# Altium PCB snes_hook.PcbDoc
Units mil, origin at the board's own origin, x right, y up, seen from the top; angles counter-clockwise.
Board outline 2105.71 x 1374.61 mil, 2 copper layers (Top Layer, Bottom Layer); 12 components, 37 nets, 155 pads, 28 vias.
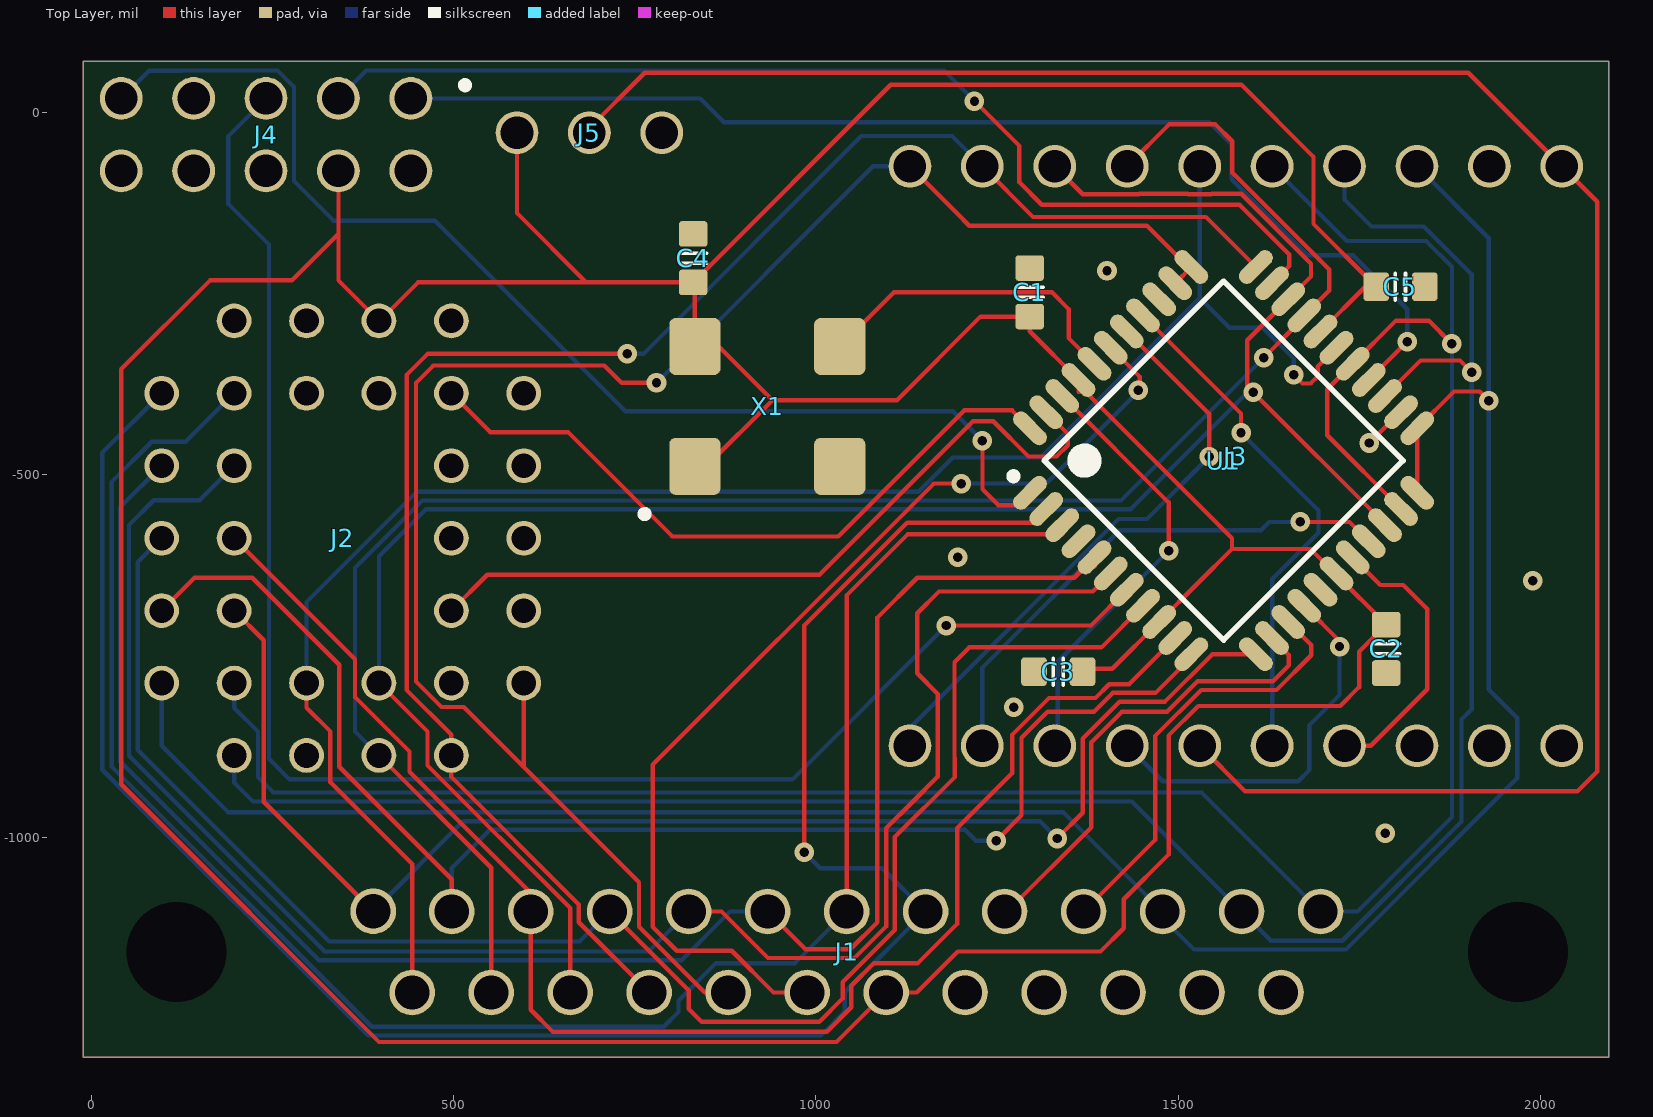
[diagram p0: Top Layer view]
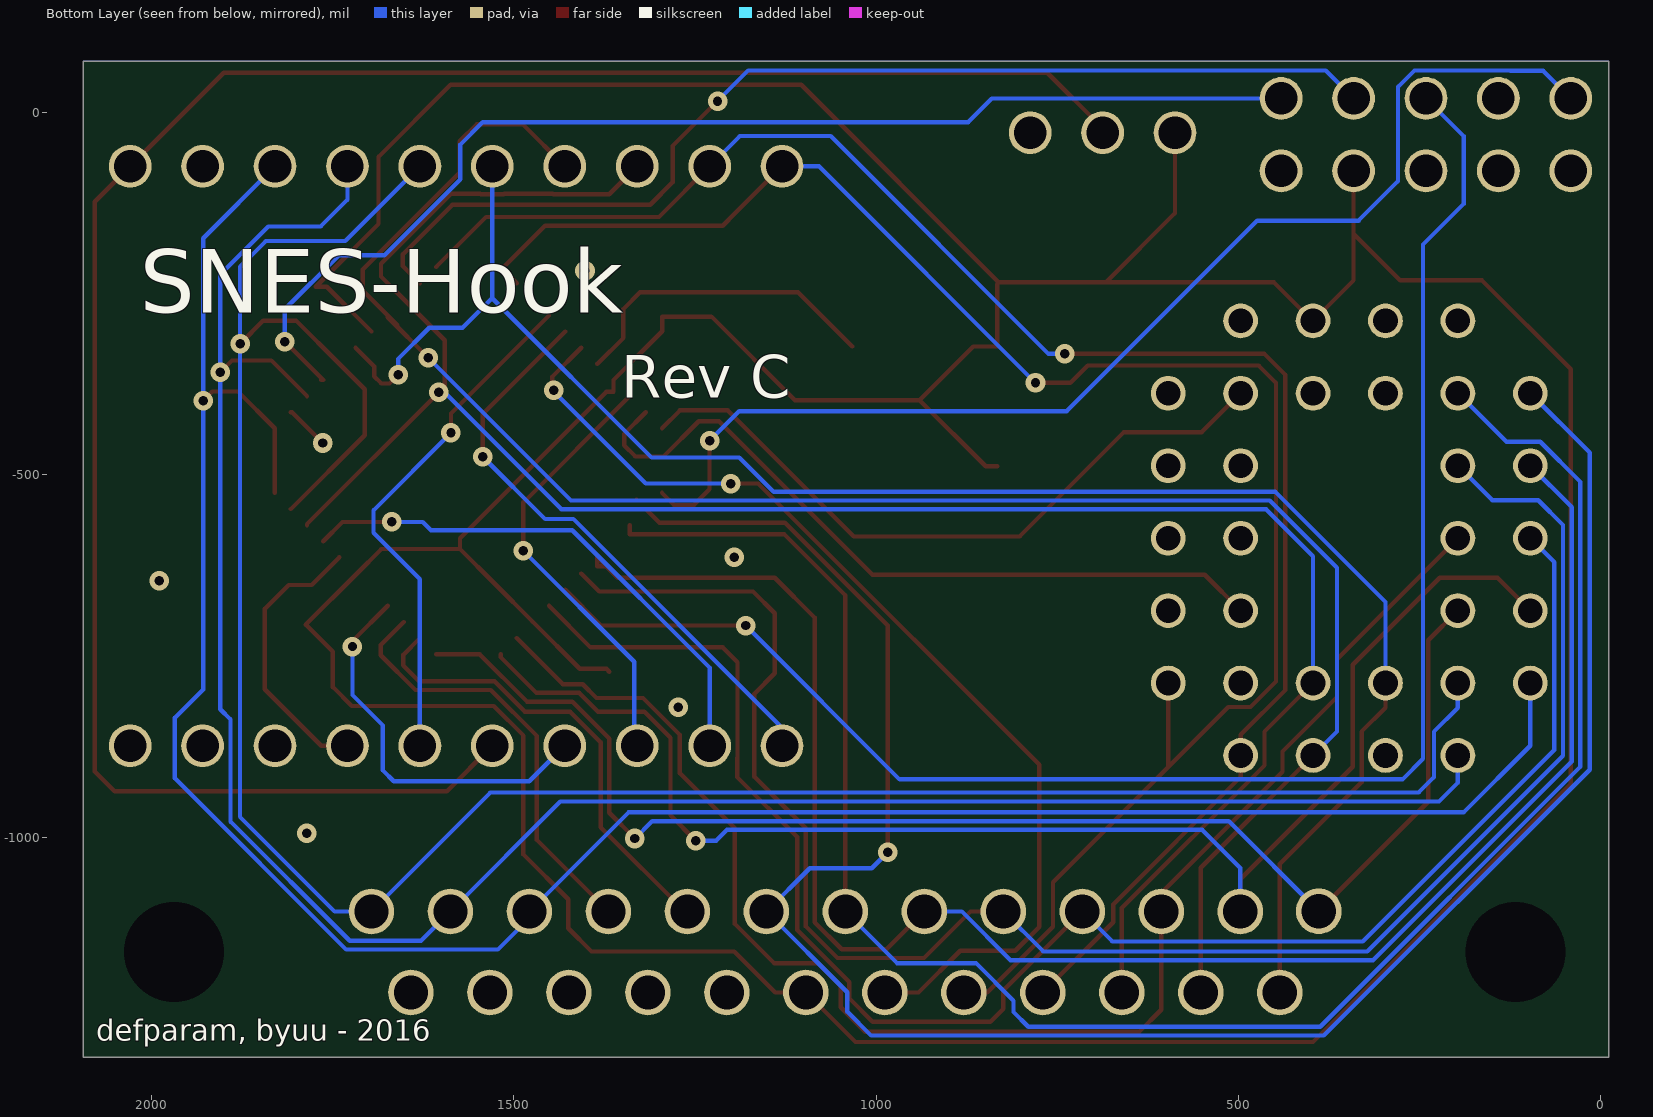
[diagram p1: Bottom Layer view, seen from below]

## Layer stack, top to bottom
Top Solder: solder mask 0.4, Solder Resist, Dk 3.5
Top Layer: signal copper 1.4
Dielectric 1: dielectric 12.6, FR-4, Dk 4.8
Bottom Layer: signal copper 1.4
Bottom Solder: solder mask 0.4, Solder Resist, Dk 3.5

## Board outline
-11.22,-1303.75 -11.22,70.87 2094.45,70.87 2094.5,-1303.75

## Design rules (kind name [scope] priority, off if disabled: settings)
Clearance [All] p1: gap=6
HoleSize [All] p1: absolutevalues=TRUE maxlimit=300 minlimit=13 maxpercent=80.000 minpercent=20.000
HoleToHoleClearance [All] p1: gap=6 allowstackedmicrovias=TRUE
MinimumAnnularRing [All] p1: minimumring=7
PolygonConnect [All] p1: connectstyle=Relief reliefconductorwidth=10 reliefentries=4 polygonreliefangle="90 Angle" airgapwidth=10
RoomDefinition snes_hook [InComponentClass('snes_hook')] p1: confinementstyle=ConfineIn formatcopy=TRUE lockcomponents=FALSE outline -428,-2536 2959,-2536 2959,538 -428,538
RoutingVias [All] p1: holewidth=25 width=40 viastyle="Through Hole" minholewidth=28 minwidth=50 maxholewidth=28 maxwidth=50
SolderMaskExpansion [All] p1: expansion=4
Width [All] p1: maxlimit=30 minlimit=6 preferedwidth=6 minimp=50.000000 maximp=50.000000 favimp=50.000000
28 further rules are at their usual default settings.

## Components (designator, comment, footprint, x,y, rotation, side; value= is the part's Value field where it differs from the comment)
C1 "approved sub OK" CAPC1608X90N 1295.28,-248.03 r90 top
C2 "approved sub OK" CAPC1608X90N 1787.4,-740.16 r270 top
C3 "approved sub OK" CAPC1608X90N 1334.65,-771.65 r180 top
C4 "approved sub OK" CAPC1608X90N 830.71,-200.79 r90 top
C5 "approved sub OK" CAPC1608X90N 1807.09,-240.16 r0 top
J1 "SNES_EXP_DB25" DB-25_RA_MPLUG 279.53,-177.17 r0 top locked
J2 "SST39SF010A-PLCC32" PLCC_SOCKET_7x9_32P 196.85,-287.4 r0 top locked
J3 "ADAFRUIT_232H" ADAFRUIT_232H 1129.92,-874.02 r90 top locked
J4 "ALTERA_JTAG_CONN" JTAG_CONN 440.94,19.68 r180 top locked
J5 "SELECT_3PIN" HEADER_3PIN 787.4,-27.56 r180 top locked
U1 "EPM7064STC44-10" TQFP44_L 1562.99,-480.32 r45 top locked
X1 "CTX314CT-ND" OSCILLATOR_7x5 933.07,-405.51 r0 top

## Footprints (in the part's own frame and the unit in brackets; to place one, negate y for a bottom-side part, rotate by r counter-clockwise, add the part's x,y. Pads: shape width x height; smd on the part's side, far side on the other; paste and mask are expansions set on the pad)
ADAFRUIT_232H [mil]
  round 59 hole 45: 1(0,0) 2(0,-100) 3(0,-200) 4(0,-300) 5(0,-400) 6(0,-500) 7(0,-600) 8(0,-700) 9(0,-800) 10(0,-900) 11(800,-900) 12(800,-800) 13(800,-700) 14(800,-600) 15(800,-500) 16(800,-400) 17(800,-300) 18(800,-200) 19(800,-100) 20(800,0)
  body extent -48,-1247 853,264, height 510
CAPC1608X90N [mm] "Chip Capacitor, Body 1.6x0.8mm, EIA 0603, IPC Medium Density"
  round 0.254 on Mech15: 0(0,0)
  rrect25% 0.9x1 smd: 1(-0.85,0) 2(0.85,0)
  Top Layer pour cut-out: -0.6,0.5 -0.4,0.7 0.4,0.7 0.6,0.5 0.6,-0.5 0.4,-0.7 -0.4,-0.7 -0.6,-0.5
  silkscreen extent -0.18,-0.48 0.18,0.48, body extent -0.85,-0.45 0.85,0.45, height 0.89
DB-25_RA_MPLUG [mm]
  round 1.6 hole 1.2: 1(2.78,-23.5) 2(5.53,-23.51) 3(8.3,-23.51) 4(11.07,-23.51) 5(13.84,-23.51) 6(16.61,-23.51) 7(19.38,-23.51) 8(22.15,-23.51) 9(24.92,-23.51) 10(27.69,-23.51) 11(30.46,-23.51) 12(33.23,-23.51) 13(36,-23.51) 14(4.145,-26.35) 15(6.915,-26.35) 16(9.685,-26.35) 17(12.455,-26.35) 18(15.225,-26.35) 19(17.995,-26.35) 20(20.765,-26.35) 21(23.535,-26.35) 22(26.305,-26.35) 23(29.075,-26.35) 24(31.845,-26.35) 25(34.615,-26.35)
  round 1.524 hole 3.5 unplated: ""(-4.12,-24.93) ""(42.92,-24.93)
  body extent -7.16,-40.59 45.87,-21.44, height 12.55
HEADER_3PIN [mm]
  round 1.5 hole 1.143: 1(0,0) 2(2.54,0) 3(5.08,0)
  body extent -1.27,-1.27 6.35,1.27, height 8.54
JTAG_CONN [mm]
  round 1.5 hole 1.143: 1(0,0) 2(0,2.54) 3(2.54,0) 4(2.54,2.54) 5(5.08,0) 6(5.08,2.54) 7(7.62,0) 8(7.62,2.54) 9(10.16,0) 10(10.16,2.54)
  body extent -1.27,-1.27 11.43,3.81, height 8.54
OSCILLATOR_7x5 [mm] "SMD Crystal 4-lead leadless package"
  rrect25% 1.8x2 smd mask+0.075: 1(-2.54,-2.1) 2(2.54,-2.1) 3(2.54,2.1) 4(-2.54,2.1)
  body extent -3.55,-2.5 3.45,2.5, height 1.65
PLCC_SOCKET_7x9_32P [mil]
  round 48 hole 34: 1(200,-100) 2(100,0) 3(100,-100) 4(0,0) 5(-100,-100) 6(0,-100) 7(-100,-200) 8(0,-200) 9(-100,-300) 10(0,-300) 11(-100,-400) 12(0,-400) 13(-100,-500) 14(0,-600) 15(0,-500) 16(100,-600) 17(100,-500) 18(200,-600) 19(200,-500) 20(300,-600) 21(400,-500) 22(300,-500) 23(400,-400) 24(300,-400) 25(400,-300) 26(300,-300) 27(400,-200) 28(300,-200) 29(400,-100) 30(300,0) 31(300,-100) 32(200,0)
  body extent -203,-712 517,108, height 330
TQFP44_L [mm] "Thin QFP, 44-Leads, Body 10x10mm, Pitch 0.8mm, IPC High Density"
  oval 1.45x0.55 smd: 1(-5.6,4) 2(-5.6,3.2) 3(-5.6,2.4) 4(-5.6,1.6) 5(-5.6,0.8) 6(-5.6,0) 7(-5.6,-0.8) 8(-5.6,-1.6) 9(-5.6,-2.4) 10(-5.6,-3.2) 11(-5.6,-4) 23(5.6,-4) 24(5.6,-3.2) 25(5.6,-2.4) 26(5.6,-1.6) 27(5.6,-0.8) 28(5.6,0) 29(5.6,0.8) 30(5.6,1.6) 31(5.6,2.4) 32(5.6,3.2) 33(5.6,4)
  oval 0.55x1.45 smd: 12(-4,-5.6) 13(-3.2,-5.6) 14(-2.4,-5.6) 15(-1.6,-5.6) 16(-0.8,-5.6) 17(0,-5.6) 18(0.8,-5.6) 19(1.6,-5.6) 20(2.4,-5.6) 21(3.2,-5.6) 22(4,-5.6) 34(4,5.6) 35(3.2,5.6) 36(2.4,5.6) 37(1.6,5.6) 38(0.8,5.6) 39(0,5.6) 40(-0.8,5.6) 41(-1.6,5.6) 42(-2.4,5.6) 43(-3.2,5.6) 44(-4,5.6)
  silkscreen extent -5.72,-4.45 4.45,4.95, body extent -5,-5 5,5, height 1.2

## Part data
C1 C2 C3 C4 C5: library part CAPC_100n_0603_X7R_50V_10%, "Capacitor SMD Cer 100nF 10% 50V X7R 0603"
U1: "MAX 7000S 5V In-System Programmable CPLD, 64 Macrocells, 44-Pin TQFP, Speed Grade 10, Commercial Grade"
X1: library part CTX314CT-ND_40MHz, "40 MHz 5v Oscillator"

## Via types
v1: diameter 27, hole 13, Top Layer to Bottom Layer, tented both sides, 28 vias

## Nets (pads, with @x,y where several pads share a name; then routed paths per layer and width w, separated by ;. In a path a pad name is that pad's centre, name@x,y a point inside that pad or via, vN(x,y) a via of type N, cw(c..) or ccw(c..) an arc to the next point about the centre after c; other vN are vias at no path point)
CLK_40: U1.40 X1.3 | length 447
  Top Layer w6: X1.3 1107.9,-248 1326,-248 1349,-271 1349,-310.86 U1.40
D0: J1.11 J2.13 J3.13 U1.22 U1.23 | length 3294.1
  Top Layer w6: U1.22 U1.23 1881.02,-385 1916.5,-385 v1(1929.13,-397.64)
  Bottom Layer w6: J2.13 96.85,-873.85 189,-966 1341.98,-966 J1.11 1478.74,-1111.74 1522.25,-1155.25 1731.8,-1155.25 1968.42,-918.63 1968.42,-835.52 1929.13,-796.23 v1(1929.13,-397.64) 1929.13,-173.23 J3.13
D1: J1.12 J2.14 J3.14 U1.25 | length 3063.2
  Top Layer w6: U1.25 1834.94,-342 1889.24,-342 v1(1905.51,-358.27)
  Bottom Layer w6: J2.14 196.85,-924.85 223,-951 1436.04,-951 J1.12 1628.29,-1143.25 1726.83,-1143.25 1891.42,-978.66 1891.42,-837.58 1905.51,-823.49 v1(1905.51,-358.27) 1905.51,-223.19 1839.37,-157.04 1766.99,-157.04 1729.92,-119.98 J3.14
D2: J1.13 J2.15 J3.15 U1.21 U1.27 | length 3419.9
  Top Layer w6: U1.21 1706,-445.16 1706,-381.85 U1.27 1800.85,-287 1846.05,-287 v1(1877.95,-318.9)
  Bottom Layer w6: J2.15 196.85,-821.4 229.85,-854.4 229.85,-917.22 251.14,-938.51 1532.61,-938.51 J1.13 1747.64,-1102.76 1878.18,-972.22 1878.18,-212.82 1842.52,-177.17 1733.07,-177.17 J3.15
D3: J1.14 J2.17 J3.16 U1.28 | length 2649.5
  Top Layer w6: J2.17 296.85,-821.4 329.85,-854.4 329.85,-924.34 442.72,-1037.2 J1.14 ; v1(1660,-362) 1671.92,-373.92 1683.08,-373.92 1693,-364 1693,-350.31 U1.28
  Bottom Layer w6: J2.17 296.85,-675.59 448.82,-523.62 449.01,-523.43 1080.5,-523.43 1141.57,-523.43 1189,-476 1310,-476 1529.92,-256.08 J3.16 1529.92,-255.92 1571,-297 1617,-297 1660,-340 v1(1660,-362)
D4: J1.15 J2.18 J3.17 U1.30 | length 2628.3
  Top Layer w6: J2.18 551.77,-1042.32 J1.15 ; J3.17 1488.19,-15.75 1551.18,-15.75 1574.8,-39.37 1574.8,-82.68 1708.66,-216.54 1708.66,-245.56 U1.30 ; v1(1618.11,-338.58) 1674.35,-282.34 U1.30 ; U1.30@1661.01,-293.21 U1.30
  Bottom Layer w6: J2.18 363.78,-854.34 363.78,-628.34 456.69,-535.43 1421.26,-535.43 v1(1618.11,-338.58)
D5: J1.16 J2.19 J3.18 U1.20 U1.31 | length 2899
  Top Layer w6: J2.19 463.85,-854.4 463.85,-901.07 660.83,-1098.05 J1.16 ; J3.18 1368.42,-112.52 1445.87,-112.52 1446.38,-112 1513.46,-112 1513.97,-112.52 1545.87,-112.52 1546.38,-112 1587.15,-112 1683.58,-208.42 1683.58,-226.1 U1.31 1595.61,-314.07 1595.61,-377.85 1603.76,-386 v1(1604,-386) 1604,-386.24 1785.7,-567.94 U1.20
  Bottom Layer w6: J2.19 396.85,-612.25 461.66,-547.43 1434.57,-547.43 1596,-386 v1(1604,-386)
D6: J1.17 J2.20 J3.19 U1.33 | length 2375.3
  Top Layer w6: v1(739.58,-333) 551,-333 464,-333 435,-362 435,-797 496.85,-858.85 J2.20 496.85,-917.1 672.83,-1093.08 672.83,-1117.51 J1.17 ; J3.19 1299.9,-144 1538.47,-144 U1.33
  Bottom Layer w6: v1(739.58,-333) 761.99,-333 1062.78,-32.21 1188.11,-32.21 J3.19
D7: J1.18 J2.21 J3.20 U1.34 U1.35 | length 2476.2
  Top Layer w6: J2.21 596.85,-903.26 ; v1(780,-373) 732,-373 708,-349 472,-349 448,-373 448,-785.22 483.18,-820.4 513.99,-820.4 596.85,-903.26 ; J1.18 846.57,-1214.57 755.85,-1123.85 755.85,-1062.26 596.85,-903.26 ; J3.20 1194.11,-138.21 1211.9,-156 1457,-156 1514.06,-213.06 U1.34 U1.35
  Bottom Layer w6: v1(780,-373) 1078.98,-74.02 J3.20
GND: C1.2 C2.2 C3.2 C4.2 C5.2 J1.23 J2.2 J2.3 J2.4 J2.16 J2.22 J2.23 J2.25 J2.26 J2.27 J2.28 J2.29 J3.12 J4.2 J4.10 U1.4 U1.16 U1.24 U1.36 X1.2 | length 61.6
  Top Layer w6: v1(1764,-456) 1806.5,-413.5 U1.24
  other v1: 1786,-995 1273,-821 1990,-646 1196,-614 1402,-218
PA0: J1.1 J2.12 U1.12 | length 1940
  Top Layer w6: J2.12 237.78,-728.34 237.78,-951.17 J1.1 ; v1(1333,-1002) 1368.42,-966.58 1368.42,-864.1 1419.52,-813 1482,-813 1547.43,-747.57 U1.12
  Bottom Layer w6: J1.1 513.34,-978 1309,-978 v1(1333,-1002)
PA1: J1.2 J2.11 U1.11 | length 2008.7
  Top Layer w6: J2.11 142.25,-642 222,-642 342,-762 342,-903 497.24,-1058.24 J1.2 ; v1(1249,-1005) 1283.99,-970.01 1283.99,-863.01 1320,-827 1383.97,-827 1409.97,-801 1468.99,-801 1518.45,-751.54 U1.11
  Bottom Layer w6: J1.2 497.24,-1042.76 550,-990 1206,-990 1221,-1005 v1(1249,-1005) 1253.38,-1005 v1@1256.69,-1001.69
PA2: J1.3 J2.10 U1.10 | length 2074
  Top Layer w6: J2.10 363.85,-754.4 363.85,-806.85 439,-882 439,-910 606.3,-1077.3 J1.3 606.3,-1238.3 637,-1269 1015,-1269 1049,-1235 1049,-1205.34 1080.27,-1174.07 1140.93,-1174.07 1195,-1120 1195,-988 1271,-912 1271,-859 1322,-808 1386,-808 1405,-789 1432.47,-789 U1.10
PA3: J1.4 J2.9 U1.8 | length 2318.6
  Top Layer w6: J1.4@715.35,-1102.77 824.41,-1211.82 824.41,-1237.21 842.41,-1255.21 1004.62,-1255.21 1037,-1222.83 1037,-1200.37 1109,-1128.37 1109,-1000 1192,-917 1192,-890.54 1191.42,-889.96 1191.42,-758.57 1211.78,-738.21 1394.18,-738.21 U1.8
  Bottom Layer w6: J2.9 63.78,-620.47 63.78,-879.78 328.21,-1144.21 673.9,-1144.21 J1.4
PA4: J1.5 J2.8 U1.6 | length 2485.8
  Top Layer w6: J1.5 869.76,-1102.76 934,-1167 1053.4,-1167 1097,-1123.4 1097,-988 1133,-952 1168.42,-916.58 1168.42,-802.42 1140,-774 1140,-691 1170,-661 1382.31,-661 U1.6
  Bottom Layer w6: J2.8 149.25,-535 86,-535 51.78,-569.22 51.78,-887.78 322,-1158 769.17,-1158 J1.5
PA5: J1.6 J2.7 U1.5 | length 2435.1
  Top Layer w6: J1.6 985.71,-1155 1047.55,-1155 1085,-1117.55 1085,-697 1140,-642 1356.77,-642 U1.5@1372.56,-626.21 ; U1.5@1372.56,-626.21 1384.82,-626.21 U1.5 U1.5@1372.56,-626.21
  Bottom Layer w6: J2.7 39.78,-544.47 39.78,-895.78 314,-1170 814.44,-1170 881.68,-1102.76 J1.6
PA6: J1.7 J2.6 U1.3 | length 2633.3
  Top Layer w6: J1.7 1042.52,-666.42 1126.73,-582.21 1340.28,-582.21 U1.3
  Bottom Layer w6: J2.6 129.85,-454.4 83.18,-454.4 27.78,-509.8 27.78,-902.78 387,-1262 790,-1262 810.38,-1241.62 810.38,-1225.85 862.16,-1174.07 971.21,-1174.07 J1.7
PA7: J1.8 J2.5 U1.2 | length 2843.9
  Top Layer w6: v1(984,-1021) 984,-707.97 1125.97,-566 1299.14,-566 U1.2 ; U1.2@1330.78,-534.35 U1.2@1330.78,-534.21
  Bottom Layer w6: J2.5 15,-469.25 15,-906.97 382.03,-1274 1007,-1274 1040,-1241 1040,-1214.33 J1.8 1091.82,-1043 1006,-1043 v1(984,-1021)
PARD_N: J1.10 U1.14 | length 604
  Top Layer w6: J1.10 1468.42,-1004.02 1468.42,-860.58 1532,-797 1635.97,-797 1683.97,-749 1683.97,-734.92 U1.14
PAWR_N: J1.9 U1.13 | length 663.7
  Top Layer w6: J1.9@1275.21,-1102.76 J1.9 1264.06,-1102.76 1380.42,-986.4 1380.42,-869.07 1422.49,-827 1484.97,-827 1526.97,-785 1631,-785 1653,-763 1653,-748.49 U1.13
ROM_OE_N: J2.24 U1.43 | length 1043.9
  Top Layer w6: J2.24 546.25,-638 1005,-638 1217,-426 1245,-426 1293.59,-474.59 1332.41,-474.59 1348,-459 1348,-443.49 U1.43
ROM_WR_N: J2.31 U1.44 | length 963.1
  Top Layer w6: J2.31 550.45,-441 658,-441 802,-585 1031,-585 1110,-506 1205,-411 1270.97,-411 U1.44
RST_N: J1.19 U1.39 | length 1436.9
  Top Layer w6: J1.19 941.57,-1214.57 884,-1157 808,-1157 775,-1124 775,-1045 775,-900 1123,-552 1163,-512 v1(1201,-512) ; U1.39 1447,-364.32 1447,-383 v1(1445,-383)
  Bottom Layer w6: v1(1201,-512) 1318,-512 1445,-385 v1(1445,-383)
SNES_5V: C1.1 C2.1 C3.1 C4.1 C5.1 J1.20 J2.32 J4.4 J5.3 U1.9 U1.17 U1.29 U1.41 X1.1 X1.4 | length 7241.6
  Top Layer w6: J4.4 340.94,-167.06 ; J5.3 587.4,-138.58 683.07,-234.25 ; X1.1 848.81,-488.19 940,-397 ; C3.1@1368.42,-771.65 1372.36,-767.72 1409.22,-767.72 U1.9 1527.33,-649.61 1574.57,-602.36 ; U1.29 1758.61,-240.16 C5.1 1687,-153.54 1687,-61 1587.5,38.5 1103.46,38.5 C4.1 ; 340.94,-167.06 340.94,-231.5 J2.32 397.64,-287.4 450.79,-234.25 683.07,-234.25 ; 340.94,-167.06 276.5,-231.5 163.5,-231.5 41,-354 41,-927 397,-1283 1028.61,-1283 J1.20 1139.43,-1214.57 1196,-1158 1393,-1158 1425,-1126 1425,-1086 1487,-1024 1487,-860 1528,-819 1724,-819 1750,-793 1750,-744.09 C2.1 1717.91,-637.2 1683.07,-602.36 1574.57,-602.36 ; 683.07,-234.25 C4.1 ; C4.1 833.07,-236.61 X1.4 865.83,-322.83 940,-397 ; 940,-397 1112,-397 1227.5,-281.5 C1.1 1295.28,-301.68 U1.41 1362.55,-385.46 1372.63,-385.46 1574.57,-587.4 1574.57,-602.36
TCK: J4.1 U1.26 | length 1646.2
  Top Layer w6: U1.26@1766.04,-368.96 U1.26 v1(1816.39,-316)
  Bottom Layer w6: J4.1 840.31,19.69 873,-13 1543,-13 1574,-44 1574,-92 1679,-197 1742,-197 1816.39,-271.39 v1(1816.39,-316)
TDI: J4.9 U1.1 | length 1641.9
  Top Layer w6: v1(1230,-453) 1230,-520 1252,-542 1278.59,-542 U1.1
  Bottom Layer w6: J4.9 79.26,58 124.77,58 124.99,58.21 256.9,58.21 279.47,35.64 279.47,-94.47 334,-149 474,-149 737,-412 1189,-412 v1(1230,-453)
TDO: J4.3 U1.32 | length 1512.6
  Top Layer w6: v1(1219,16) 1281,-46 1281,-96 1312,-127 1585,-127 1653.59,-195.59 1653.59,-211.54 U1.32
  Bottom Layer w6: J4.3 379.47,58.21 1176.79,58.21 v1(1219,16)
TMS: J4.5 U1.7 | length 2261
  Top Layer w6: v1(1180,-708) 1379.85,-708 U1.7
  Bottom Layer w6: J4.5 189,-32.26 189,-126 245,-182 245,-892 273.4,-920.4 967.6,-920.4 v1(1180,-708)
USB_5V: J3.5 J3.11 J5.2 | length 2875.9
  Top Layer w6: J5.2 687.4,-21.26 763.78,55.12 1900.79,55.12 J3.11 2078.74,-122.83 2078.74,-909.45 2051.18,-937.01 1592.91,-937.01 J3.5
USB_BIT0: J3.6 U1.37 | length 721.1
  Top Layer w6: U1.37 1587,-415.24 v1(1587,-442)
  Bottom Layer w6: v1(1587,-442) 1694,-549 1694,-580 1629.92,-644.08 J3.6
USB_BIT1: J3.7 U1.18 | length 389.7
  Top Layer w6: J3.7 1765.98,-874.02 1844,-796 1844,-685 1811,-652 1779.22,-652 U1.18
USB_BIT2: J3.9
USB_BIT3: J3.10
USB_RDN: J3.3 U1.42 | length 608.6
  Top Layer w6: U1.42 1487,-537.95 v1(1487,-605)
  Bottom Layer w6: J3.3 1334,-869.94 1334,-758 v1(1487,-605)
USB_RXFN: J3.1 U1.38 | length 812.9
  Top Layer w6: U1.38 1543,-415.78 v1(1543,-475)
  Bottom Layer w6: J3.1 1129.92,-849.08 1418,-561 1457,-561 v1(1543,-475)
USB_TXEN: J3.2 U1.19 | length 735.8
  Top Layer w6: v1(1669,-565) 1736.76,-565 U1.19
  Bottom Layer w6: J3.2 1229.92,-766.05 1419.47,-576.5 1614.5,-576.5 1626,-565 v1(1669,-565)
USB_WRN: J3.4 U1.15 | length 542.4
  Top Layer w6: U1.15 1723,-729.41 v1(1723,-737)
  Bottom Layer w6: J3.4 1478.9,-923 1666,-923 1681,-908 1681,-845.94 1723,-803.94 v1(1723,-737)
pads on no net: C1.0 C2.0 C3.0 C4.0 C5.0 J1. J1.21 J1.22 J1.24 J1.25 J2.1 J2.30 J3.8 J4.6 J4.7 J4.8 J5.1

## Polygon pours and split planes (outlines as drawn)
GND on Top Layer "NONET_L01_P000" (solid, shelved, pour order 0): -11.22,-1303.75 -11.22,70.87 2094.45,70.87 2094.5,-1303.75
GND on Bottom Layer "NONET_L02_P001" (solid, shelved, pour order 1): -11.22,-1303.75 -11.22,70.87 2094.45,70.87 2094.5,-1303.75

## Silkscreen, mask and mechanical layers (free items; w line width, h text height)
Top Overlay:
  circle w9.84: c763.56,-554.04 r4.92
  circle w9.84: c515.56,37.96 r4.92
Bottom Overlay:
  text "SNES-Hook" at 2017,-305 h150
  text "Rev C" at 1352,-413 h100
  text "defparam, byuu - 2016" at 2077,-1291 h50